# Altium PCB 1700 90 Deg hybrid.PcbDoc
Units mil, origin at the board's own origin, x right, y up, seen from the top; angles counter-clockwise.
Board outline 3350 x 2045 mil, 2 copper layers (Top Layer, Bottom Layer); 4 components, 1 nets, 20 pads, 20 vias.
Unrouted connection lines stored in the file: 2.
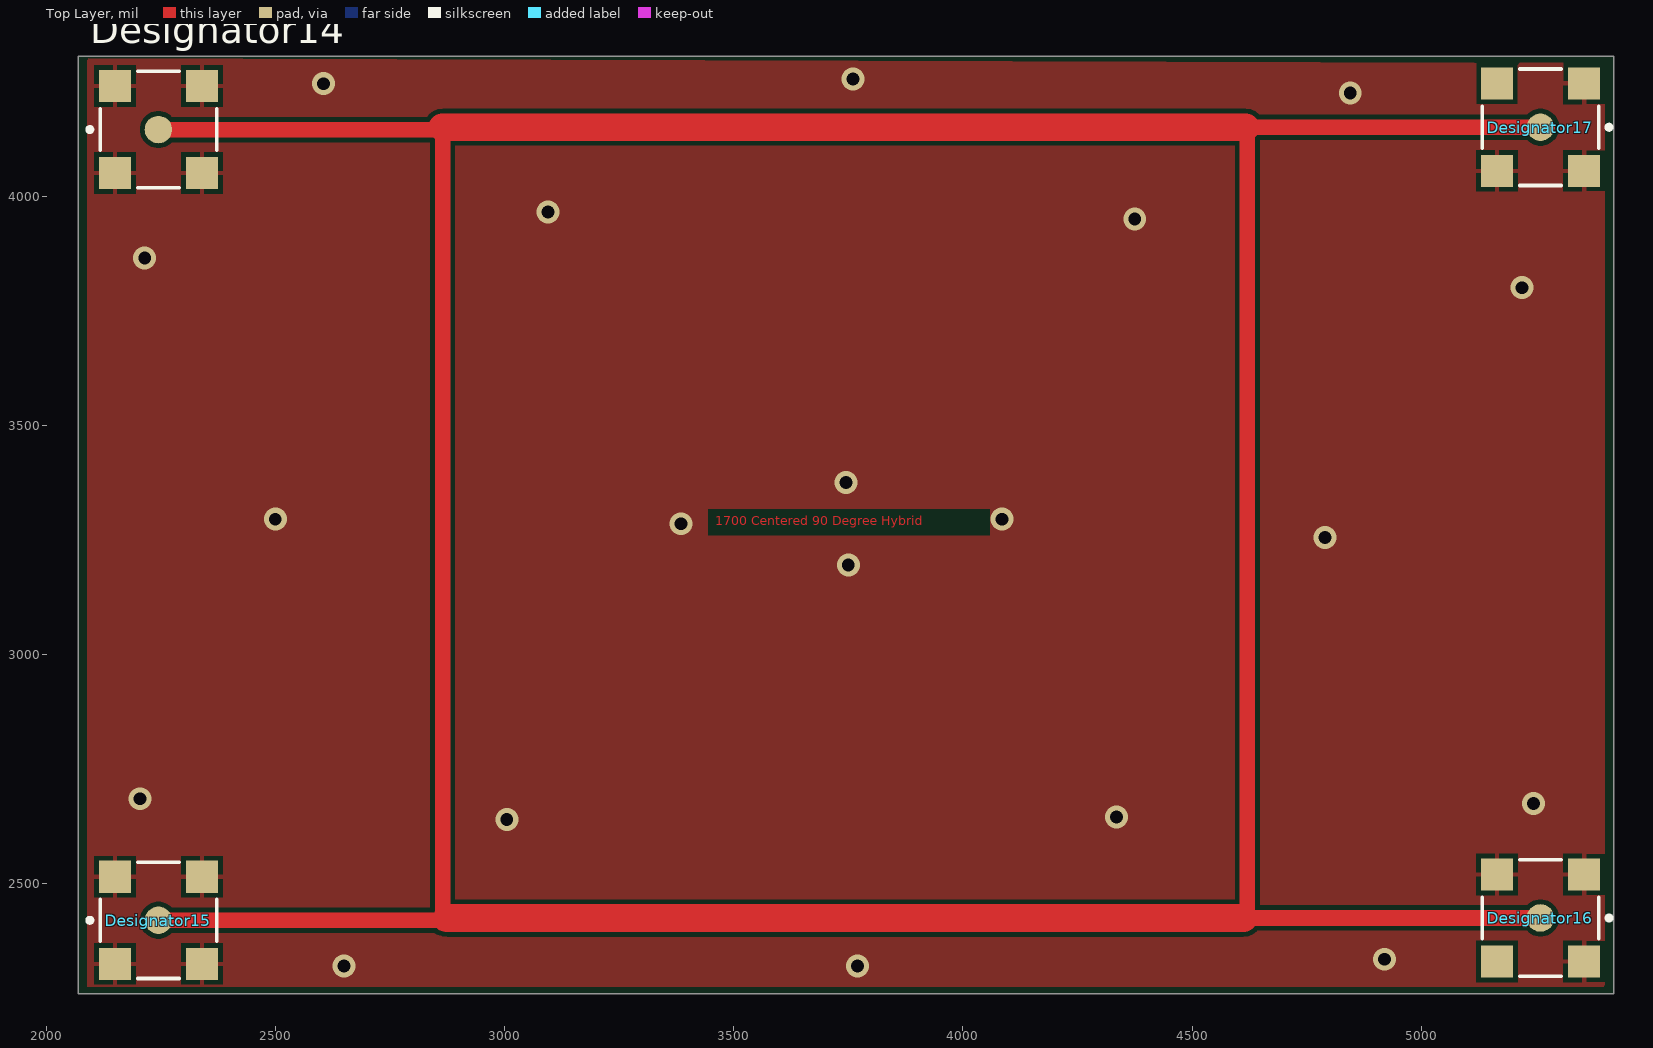
[diagram p0: Top Layer view]
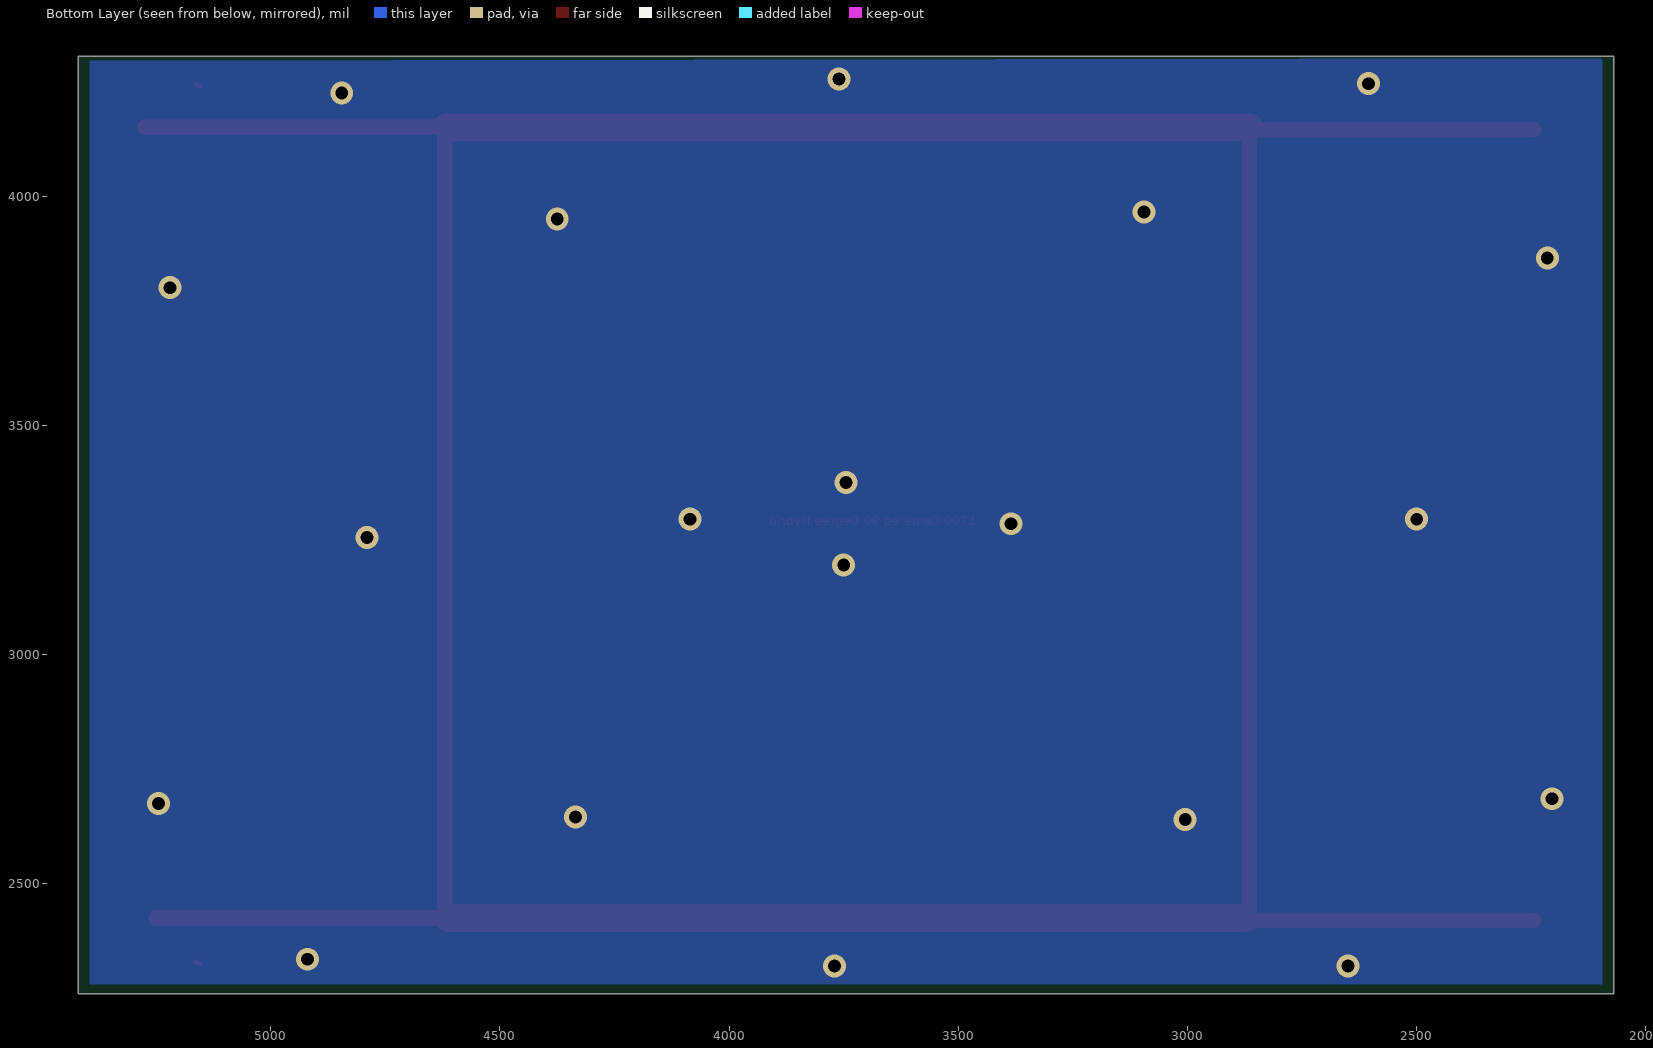
[diagram p1: Bottom Layer view, seen from below]
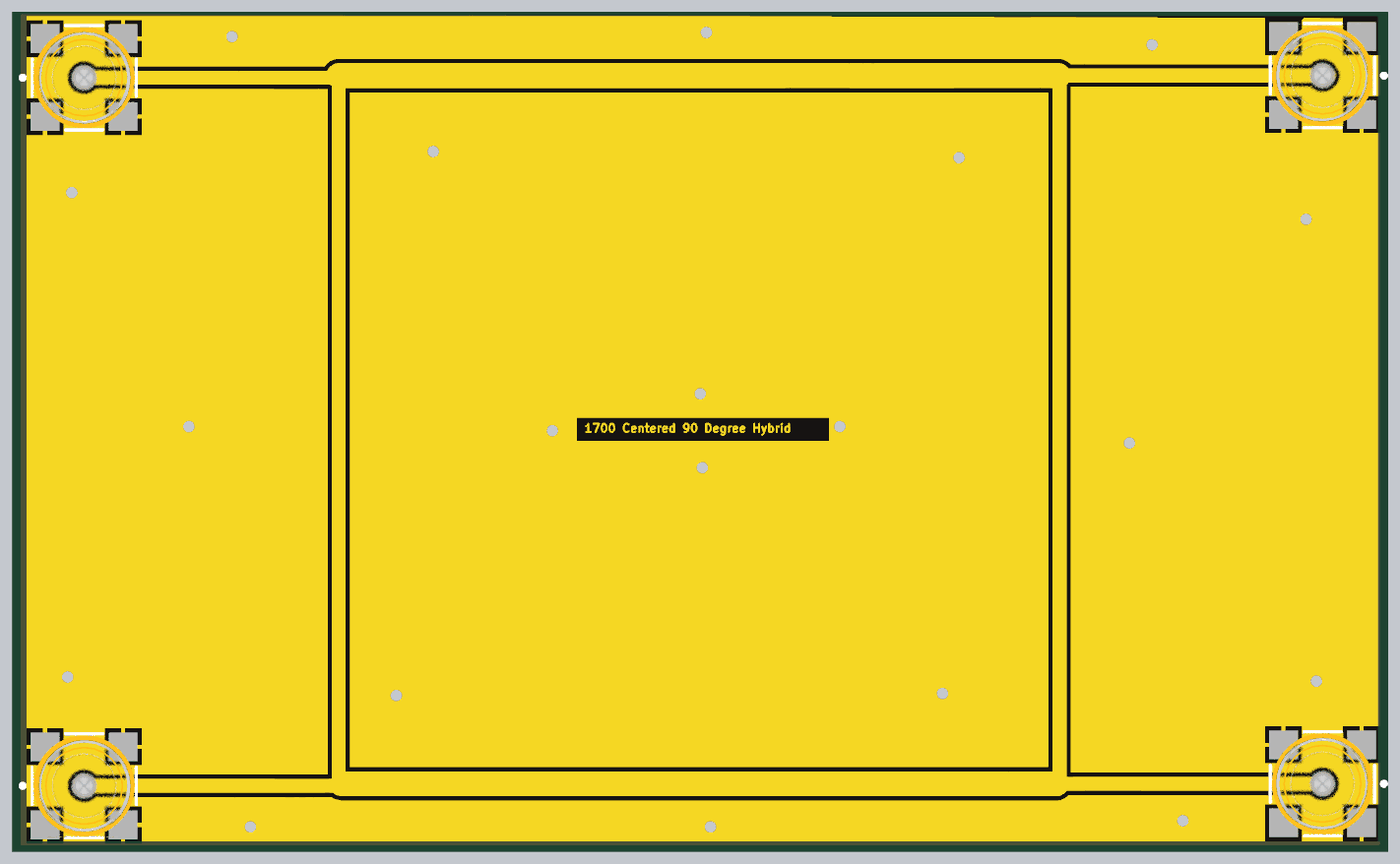
[diagram p2: 3D render of the assembled board from above, using the file's embedded part models]

## Layer stack, top to bottom
Top Solder: solder mask 0.4, Solder Resist, Dk 3.5
Top Layer: signal copper 1.4
Dielectric 1: dielectric 12.6, FR-4, Dk 4.8
Bottom Layer: signal copper 1.4
Bottom Solder: solder mask 0.4, Solder Resist, Dk 3.5

## Board outline
2070,2260 5420,2260 5420,4305 2070,4305

## Design rules (kind name [scope] priority, off if disabled: settings)
Clearance [All] p1: gap=10 ignorepadtopadclearanceinfootprint=FALSE
PolygonConnect [All] p1: connectstyle=Relief reliefconductorwidth=10 reliefentries=4 polygonreliefangle="90 Angle" airgapwidth=10
RoutingVias [All] p1: holewidth=28 width=50 viastyle="Through Hole" minholewidth=28 minwidth=50 maxholewidth=28 maxwidth=50
SolderMaskExpansion [All] p1: expansion=4 istentingtop=FALSE
Width [All] p1: maxlimit=10 minlimit=10 preferedwidth=10
30 further rules are at their usual default settings.

## Components (designator, comment, footprint, x,y, rotation, side; value= is the part's Value field where it differs from the comment)
Designator14 "Comment" FP-73251-1350-MFG 2245,4145 r0 top
Designator15 "Comment" FP-73251-1350-MFG 2245,2420 r0 top
Designator16 "Comment" FP-73251-1350-MFG 5260,2425 r180 top
Designator17 "Comment" FP-73251-1350-MFG 5260,4150 r180 top

## Footprints (in the part's own frame and the unit in brackets; to place one, negate y for a bottom-side part, rotate by r counter-clockwise, add the part's x,y. Pads: shape width x height; smd on the part's side, far side on the other; paste and mask are expansions set on the pad)
FP-73251-1350-MFG [mil]
  round 60 smd paste+0 mask+0: 1(0,0)
  rect 70x70 smd paste+0 mask+0: 2(-95,95) 3(95,95) 4(-95,-95) 5(95,-95)
  silkscreen extent -155,-127 127,127, body extent -134,-134 134,134, height 10

## Via types
v1: diameter 50, hole 28, Top Layer to Bottom Layer, 20 vias

## Nets (pads, with @x,y where several pads share a name; then routed paths per layer and width w, separated by ;. In a path a pad name is that pad's centre, name@x,y a point inside that pad or via, vN(x,y) a via of type N, cw(c..) or ccw(c..) an arc to the next point about the centre after c; other vN are vias at no path point)
GND: Designator14.2 Designator14.3 Designator14.4 Designator14.5 Designator15.2 Designator15.3 Designator15.4 Designator15.5 Designator16.2 Designator16.3 Designator16.4 Designator16.5 Designator17.2 Designator17.3 Designator17.4 Designator17.5
  other v1: 2650,2320 3770,2320 4920,2335 3005,2640 4335,2645 5245,2675 2205,2685 3750,3195 4790,3255 3385,3285 2500,3295 4085,3295 3745,3375 5220,3800 2215,3865 4375,3950 3095,3965 4845,4225 2605,4245 3760,4255
pads on no net: Designator14.1 Designator15.1 Designator16.1 Designator17.1
copper on no net: | length 9579.1
  Top Layer w10: 2872.93,4145 cw(c2872.93,4127.93) 2885,4140 ; 4127.93,4150 ccw(c4127.93,4167.07) 4140,4155 ; 5152.93,2325 ccw(c5152.93,2342.07) 5165,2330 ; 5152.93,4240 ccw(c5152.93,4257.07) 5165,4245
  Top Layer w33.91: 2865,2413.11 2865,4150 ; 4620,2418.11 4620,4155
  Top Layer w33.99: 2245,2420 2890,2420 ; 2245,4145 2872.93,4145 ; 4605,2425 5250,2425 ; 4630,4150 5275,4150
  Top Layer w60.95: 2865,4150 4127.93,4150 4140,4150 4616.89,4150 ; 2875,2425 4611.89,2425

## Polygon pours and split planes (outlines as drawn)
GND on Top Layer "GND" (solid, pour order 0): 2090,4300 2090,2275 5405,2275 5400,2280 5400,4290
GND on Bottom Layer "GND_L02_P001" (solid, pour order 1): 2095,4300 2095,2280 5395,2280 5395,4295

## Other copper
Top Layer:
  text "1700 Centered 90 Degree Hybrid" at 3460,3281.66 h20

## Silkscreen, mask and mechanical layers (free items; w line width, h text height)
Top Solder:
  rectangle: 2105,2285 5395,4295
Bottom Solder:
  rectangle: 2095,2270 5405,4300